# EAGLE board main (EAGLE 9.6.2)
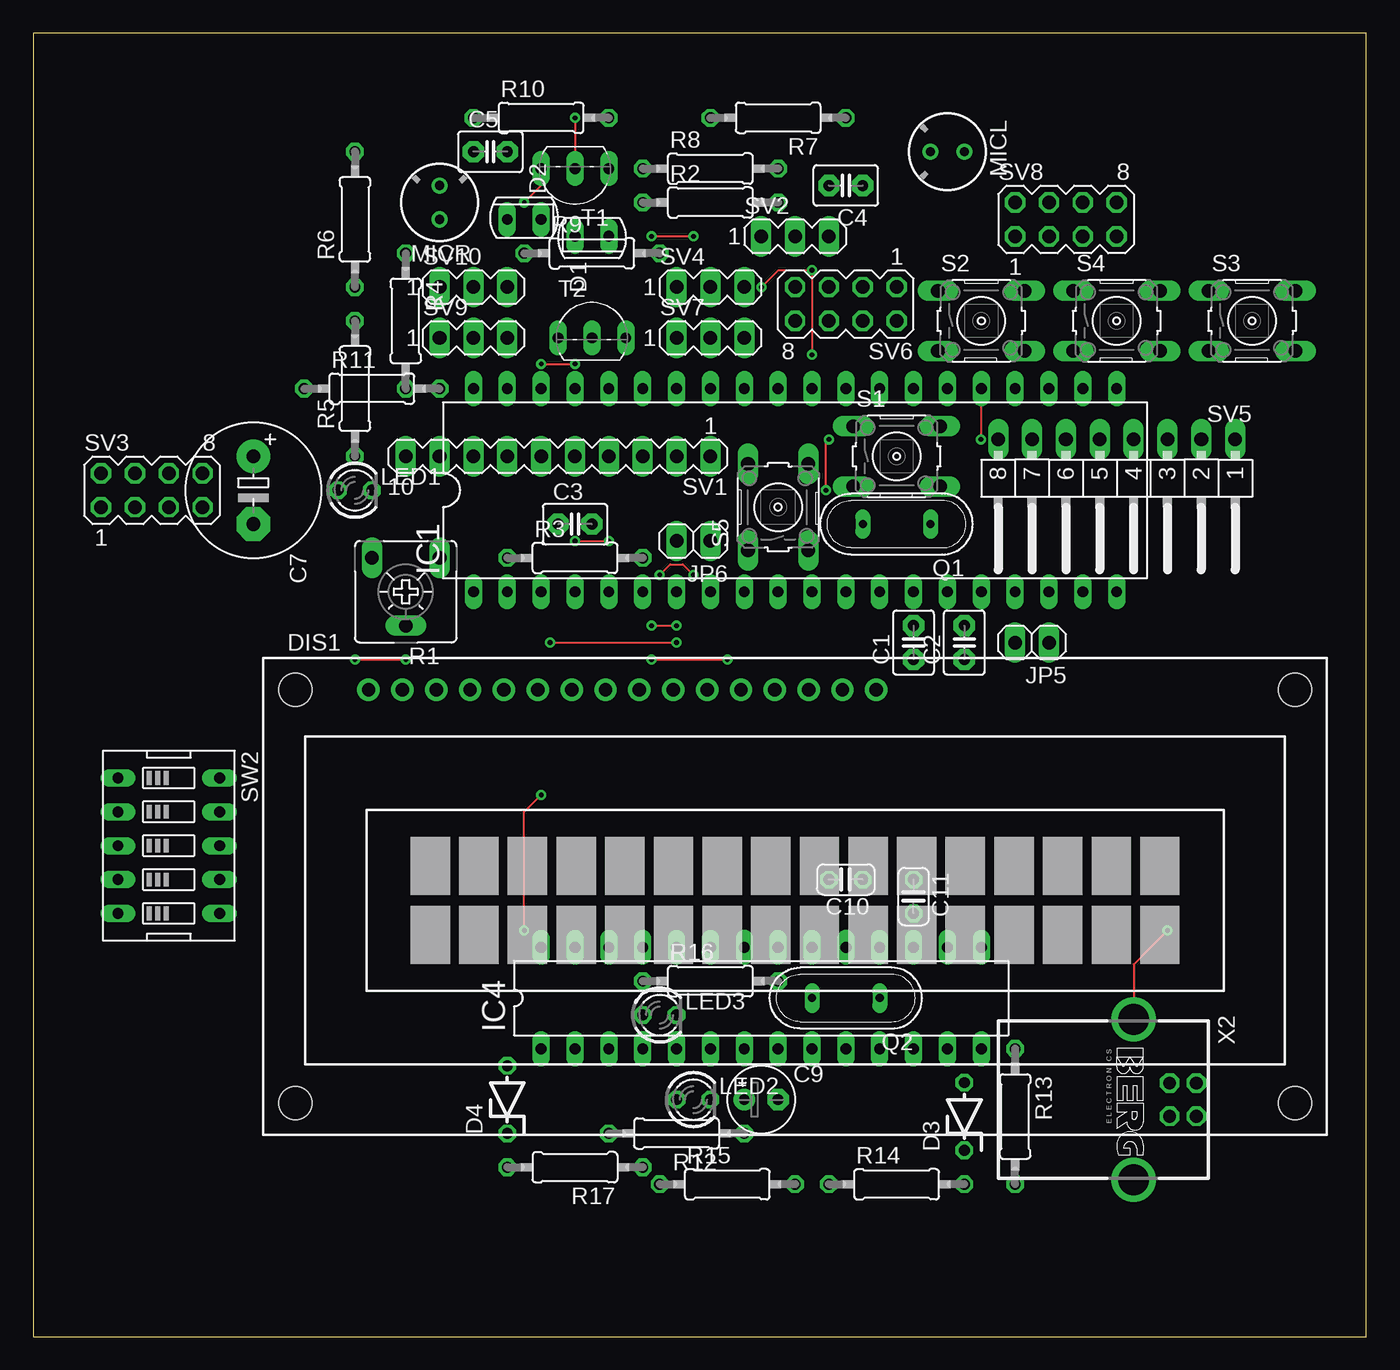
[diagram p0: board, top side]
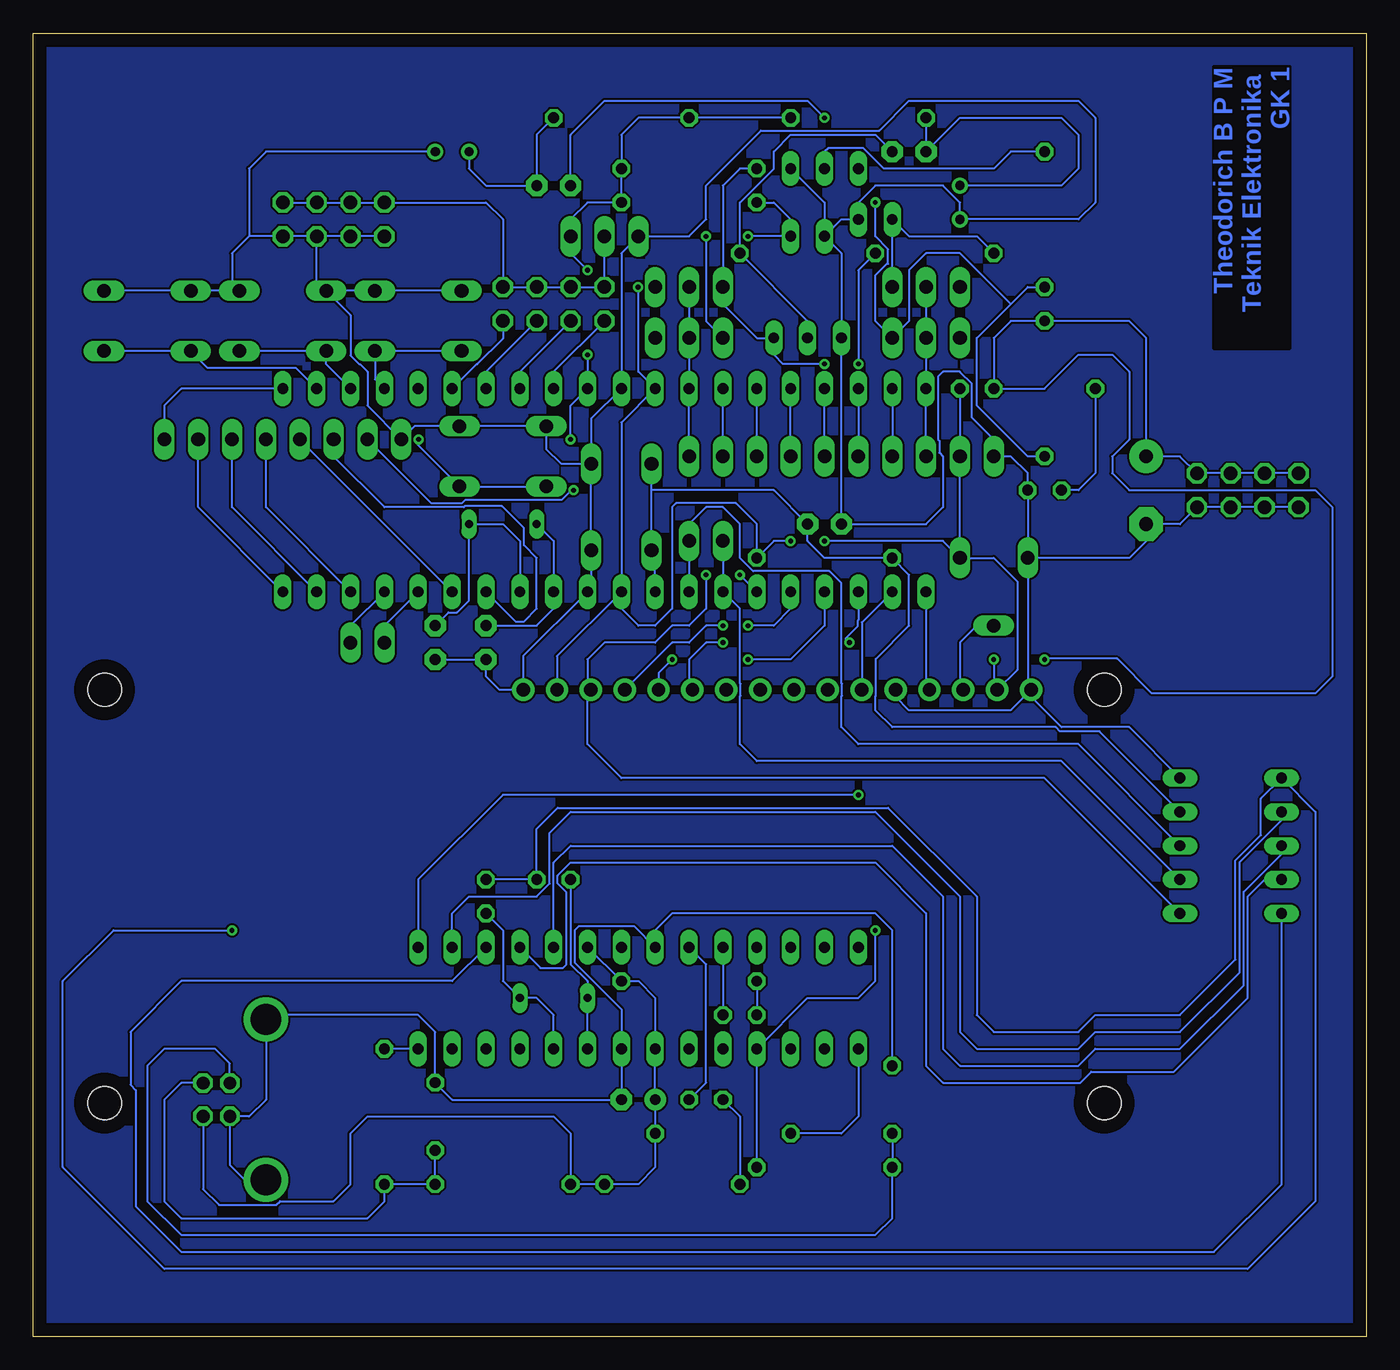
[diagram p1: board, bottom side, seen from below]

Size 100 x 97.78 mm. Coordinates in mm from the lower left corner, seen from the top.
Outline: 0,0 100,0 100,97.78 0,97.78 0,0
Copper layers (1*16): Top 0.035mm / dielectric 1.5mm / Bottom 0.035mm
Design rules "default": minimum track width 6mil, minimum drill 0.35mm, track to track 6mil, track to pad 6mil, pad to pad 6mil, via to via 6mil, smd to smd 6mil, copper to edge 40mil, drill to drill 6mil, minimum pad ring 10mil, minimum via ring 8mil, stop-mask expansion 4mil, vias tented up to drill 0mil, thermal gap 10mil

## Footprints (pad centres in the part's own frame; a part is rotated, then mirrored left to right if it is on the bottom)
C2.5-3 = drill 0.813 pad 1.6 octagon: 1 -1.27,0; 2 1.27,0
E5-10,5 = drill 1.016 pad 2.54: + -2.54,0 | drill 1.016 pad 2.54 octagon: - 2.54,0
E2,5-5 = drill 0.813 pad 1.6: + -1.27,0 | drill 0.813 pad 1.6 octagon: - 1.27,0
C025-024X044 = drill 0.813 octagon: 1 -1.27,0; 2 1.27,0
SFH225 = drill 0.813 long: A 0,1.27; K 0,-1.27
ZDIO-5 = drill 0.813 octagon: A 2.54,0; C -2.54,0
TUXGR_16X2_R2 = drill 1 pad 1.676: 1 -32,15.5; 2 -29.46,15.5; 3 -26.92,15.5; 4 -24.38,15.5; 5 -21.84,15.5; 6 -19.3,15.5; 7 -16.76,15.5; 8 -14.22,15.5; 9 -11.68,15.5; 10 -9.14,15.5; 11 -6.6,15.5; 12 -4.06,15.5; 13 -1.52,15.5; 14 1.02,15.5; 15 3.56,15.5; 16 6.1,15.5 | hole 2.5: -37.5,-15.5; 37.5,-15.5; -37.5,15.5; 37.5,15.5
DIL40 = drill 0.813 long: 1 -24.13,-7.62; 2 -21.59,-7.62; 3 -19.05,-7.62; 4 -16.51,-7.62; 5 -13.97,-7.62; 6 -11.43,-7.62; 7 -8.89,-7.62; 8 -6.35,-7.62; 9 -3.81,-7.62; 10 -1.27,-7.62; 11 1.27,-7.62; 12 3.81,-7.62; 13 6.35,-7.62; 14 8.89,-7.62; 15 11.43,-7.62; 16 13.97,-7.62; 17 16.51,-7.62; 18 19.05,-7.62; 19 21.59,-7.62; 20 24.13,-7.62; 21 24.13,7.62; 22 21.59,7.62; 23 19.05,7.62; 24 16.51,7.62; 25 13.97,7.62; 26 11.43,7.62; 27 8.89,7.62; 28 6.35,7.62; 29 3.81,7.62; 30 1.27,7.62; 31 -1.27,7.62; 32 -3.81,7.62; 33 -6.35,7.62; 34 -8.89,7.62; 35 -11.43,7.62; 36 -13.97,7.62; 37 -16.51,7.62; 38 -19.05,7.62; 39 -21.59,7.62; 40 -24.13,7.62
DIL28-3 = drill 0.813 long: 1 -16.51,-3.81; 2 -13.97,-3.81; 3 -11.43,-3.81; 4 -8.89,-3.81; 5 -6.35,-3.81; 6 -3.81,-3.81; 7 -1.27,-3.81; 8 1.27,-3.81; 9 3.81,-3.81; 10 6.35,-3.81; 11 8.89,-3.81; 12 11.43,-3.81; 13 13.97,-3.81; 14 16.51,-3.81; 15 16.51,3.81; 16 13.97,3.81; 17 11.43,3.81; 18 8.89,3.81; 19 6.35,3.81; 20 3.81,3.81; 21 1.27,3.81; 22 -1.27,3.81; 23 -3.81,3.81; 24 -6.35,3.81; 25 -8.89,3.81; 26 -11.43,3.81; 27 -13.97,3.81; 28 -16.51,3.81
1X02 = drill 1.016 long: 1 -1.27,0; 2 1.27,0
LED3MM = drill 0.813 octagon: A -1.27,0; K 1.27,0
F6050AP = drill 0.7 pad 1.2: 1 0,1.27; 2 0,-1.27
QS = drill 0.61 long: 1 -2.54,0; 2 2.54,0
CA6V = drill 1.016 long: A -2.54,-2.54; E 2.54,-2.54; S 0,2.54
0207/10 = drill 0.813 octagon: 1 -5.08,0; 2 5.08,0
B3F-10XX = drill 1.016 long: 1 -3.251,2.261; 2 3.251,2.261; 3 -3.251,-2.261; 4 3.251,-2.261
MA10-1 = drill 1.016 long: 1 -11.43,0; 2 -8.89,0; 3 -6.35,0; 4 -3.81,0; 5 -1.27,0; 6 1.27,0; 7 3.81,0; 8 6.35,0; 9 8.89,0; 10 11.43,0
MA03-1 = drill 1.016 long: 1 -2.54,0; 2 0,0; 3 2.54,0
MA04-2 = drill 1.016 octagon: 1 -3.81,-1.27; 2 -3.81,1.27; 3 -1.27,-1.27; 4 -1.27,1.27; 5 1.27,-1.27; 6 1.27,1.27; 7 3.81,-1.27; 8 3.81,1.27
MA08-1W = drill 1.016 long: 1 -8.89,0; 2 -6.35,0; 3 -3.81,0; 4 -1.27,0; 5 1.27,0; 6 3.81,0; 7 6.35,0; 8 8.89,0
EDG-05 = drill 0.813 long: 1 -5.08,-3.81; 2 -2.54,-3.81; 3 0,-3.81; 4 2.54,-3.81; 5 5.08,-3.81; 6 5.08,3.81; 7 2.54,3.81; 8 0,3.81; 9 -2.54,3.81; 10 -5.08,3.81
TO92-EBC = drill 0.813 long: B 0,-1.27; C 2.54,-1.27; E -2.54,-1.27
PN61729-S = drill 0.95 octagon: 1 1.25,4.71; 2 -1.25,4.71; 3 -1.25,2.71; 4 1.25,2.71 | drill 2.3 pad 2.9: S1 -6.02,0; S2 6.02,0

## Placement (x,y rotation side)
C1  22p  [C2.5-3]  66.04,52.07 90 top
C2  22p  [C2.5-3]  69.85,52.07 90 top
C3  10nF  [C2.5-3]  40.64,60.96 0 top
C4  100nF  [C2.5-3]  60.96,86.36 180 top
C5  100nF  [C2.5-3]  34.29,88.9 0 top
C7  1000uF/16V  [E5-10,5]  16.51,63.5 270 top
C9  10uF/16V  [E2,5-5]  54.61,17.78 0 top
C10  22pF  [C025-024X044]  60.96,34.29 180 top
C11  22pF  [C025-024X044]  66.04,33.02 270 top
D1  SFH225  [SFH225]  41.91,82.55 270 top
D2  SFH225  [SFH225]  36.83,83.82 90 top
D3  DZ3,6V  [ZDIO-5]  69.85,16.51 90 top
D4  DZ3,6V  [ZDIO-5]  35.56,17.78 90 top
DIS1  TUXGR_16X2_R2  [TUXGR_16X2_R2]  57.15,33.02 0 top
IC1  MEGA16-P  [DIL40]  57.15,63.5 0 top
IC4  MEGA8-P  [DIL28-3]  54.61,25.4 0 top
JP5  [1X02]  74.93,52.07 180 top
JP6  [1X02]  49.53,59.69 180 top
LED1  merah  [LED3MM]  24.13,63.5 0 top
LED2  Merah  [LED3MM]  49.53,17.78 0 top
LED3  hijau  [LED3MM]  46.99,24.13 0 top
MICL  MC  [F6050AP]  68.58,88.9 270 top
MICR  MC  [F6050AP]  30.48,85.09 180 top
Q1  8MHz  [QS]  64.77,60.96 180 top
Q2  12MHz  [QS]  60.96,25.4 180 top
R1  20K  [CA6V]  27.94,55.88 180 top
R2  56K  [0207/10]  50.8,85.09 0 top
R3  10K  [0207/10]  40.64,58.42 0 top
R4  56K  [0207/10]  27.94,76.2 270 top
R5  10K  [0207/10]  24.13,71.12 90 top
R6  100K  [0207/10]  24.13,83.82 90 top
R7  10K  [0207/10]  55.88,91.44 180 top
R8  10K  [0207/10]  50.8,87.63 0 top
R9  100K  [0207/10]  41.91,81.28 0 top
R10  10K  [0207/10]  38.1,91.44 0 top
R11  330  [0207/10]  25.4,71.12 0 top
R12  10K  [0207/10]  48.26,15.24 180 top
R13  68  [0207/10]  73.66,16.51 270 top
R14  2K2  [0207/10]  64.77,11.43 0 top
R15  330  [0207/10]  52.07,11.43 0 top
R16  330  [0207/10]  50.8,26.67 0 top
R17  68  [0207/10]  40.64,12.7 180 top
S1  [B3F-10XX]  64.77,66.04 0 top
S2  [B3F-10XX]  71.12,76.2 0 top
S3  [B3F-10XX]  91.44,76.2 0 top
S4  [B3F-10XX]  81.28,76.2 0 top
S5  [B3F-10XX]  55.88,62.23 90 top
SV1  [MA10-1]  39.37,66.04 180 top
SV2  [MA03-1]  57.15,82.55 0 top
SV3  [MA04-2]  8.89,63.5 0 top
SV4  [MA03-1]  50.8,78.74 0 top
SV5  [MA08-1W]  81.28,67.31 180 top
SV6  [MA04-2]  60.96,77.47 180 top
SV7  [MA03-1]  50.8,74.93 0 top
SV8  [MA04-2]  77.47,83.82 0 top
SV9  [MA03-1]  33.02,74.93 0 top
SV10  [MA03-1]  33.02,78.74 0 top
SW2  [EDG-05]  10.16,36.83 270 top
T1  [TO92-EBC]  40.64,86.36 180 top
T2  [TO92-EBC]  41.91,76.2 0 top
X2  PN61729-S  [PN61729-S]  82.55,17.78 270 top

## Library data of the parts
C1-C5 = capacitor-wima
C7 C9-C11 R2-R11 = rcl
D1 D2 = opto-trans-siemens; OC_FARNELL: unknown; OC_NEWARK: unknown
D3 D4 = diode
DIS1 = display-lcd; OC_FARNELL: unknown; OC_NEWARK: unknown
IC1 = atmel; MPN: ATMEGA16-16PU; OC_FARNELL: 9171142; OC_NEWARK: 01M6885
IC4 = atmel
JP5 JP6 = pinhead
LED1-LED3 = led
MICL MICR = microphon
Q1 Q2 SW2 = special
R1 = pot
R12-R17 = resistor
S1-S5 = switch-omron; MPN: B3F-1000; OC_FARNELL: 176432; OC_NEWARK: 36M3542
SV1-SV10 = con-lstb; OC_FARNELL: unknown; OC_NEWARK: unknown
T1 T2 = transistor
X2 = con-berg

## Nets
DGND: C9.- C10.1 C11.1 D3.A D4.A IC4.8 IC4.22 SW2.1 X2.4 X2.S1 X2.S2
GND: C1.1 C2.1 C3.1 C7.- D1.K D2.K DIS1.1 DIS1.5 DIS1.16 IC1.11 IC1.31 LED1.K MICL.1 MICR.1 R1.E S1.1 S1.2 S2.1 S2.2 S3.1 S3.2 S4.1 S4.2 S5.3 S5.4 SV1.10 SV2.1 SV3.1 SV3.3 SV3.5 SV3.7 SV5.8 SV8.1 SV8.3 SV8.5 SV8.7 SW2.10 T1.E T2.E
MISO: IC1.7 JP6.2 SW2.7
MOSI: DIS1.14 IC1.6 SW2.6
N$1: IC1.33 SV1.1 SV4.2 SV7.2
N$2: IC1.34 SV1.2
N$3: IC1.35 SV1.3
N$4: IC1.36 SV1.4
N$5: IC1.37 SV1.5
N$6: IC1.38 SV1.6
N$7: IC1.39 SV1.7
N$8: D2.A R4.1 SV10.3
N$9: IC1.24 S2.3 S2.4
N$10: DIS1.13 IC1.5
N$11: DIS1.12 IC1.4
N$12: DIS1.11 IC1.3
N$13: DIS1.6 IC1.2
N$14: R5.1 R6.1 SV9.3 T1.C
N$15: DIS1.3 R1.S
N$16: C1.2 IC1.12 Q1.2
N$17: C2.2 IC1.13 Q1.1
N$18: DIS1.4 IC1.1
N$19: D1.A R2.1 SV7.1
N$20: IC1.23 S4.3 S4.4
N$21: IC1.40 SV1.8 SV9.2 SV10.2
N$22: C4.2 R6.2 T1.B
N$23: C4.1 MICL.2 R7.1
N$24: R8.1 R9.1 SV4.1 T2.C
N$25: C5.2 R9.2 T2.B
N$26: C5.1 MICR.2 R10.1
N$27: IC1.22 S3.3 S3.4
N$28: IC1.25 S1.3 S1.4
N$30: IC1.21 SV5.1
N$32: IC1.20 SV5.2
N$33: IC1.19 SV5.3
N$34: IC1.18 SV5.4
N$35: IC1.15 SV5.5
N$36: IC1.14 SV5.6
N$37: IC1.16 JP5.2
N$38: IC1.17 JP5.1
N$41: LED1.A R11.1
N$42: IC4.1 R12.2
N$44: IC1.26 SV6.2
N$45: IC1.27 SV6.4
N$46: IC1.28 SV6.6
N$47: IC1.29 SV6.8
N$51: C10.2 IC4.9 Q2.2
N$52: C11.2 IC4.10 Q2.1
N$53: IC4.14 R13.1
N$55: LED2.A R15.1
N$56: LED3.A R16.1
N$57: IC4.23 LED2.K
N$58: IC4.24 LED3.K
N$59: D4.C R17.2 X2.3
N$67: IC4.4 IC4.15 R17.1
N$69: D3.C R13.2 R14.2 X2.2
N$175: IC4.17 SW2.5
N$176: IC4.18 SW2.4
N$177: IC4.19 SW2.3
N$178: IC4.16 SW2.2
RESET: C3.2 IC1.9 R3.1 S5.1 S5.2 SW2.9
SCK: IC1.8 JP6.1 SW2.8
VCC: C7.+ DIS1.2 DIS1.15 IC1.10 IC1.30 IC1.32 R1.A R2.2 R3.2 R4.2 R5.2 R7.2 R8.2 R10.2 R11.2 SV1.9 SV2.3 SV3.2 SV3.4 SV3.6 SV3.8 SV5.7
VDD: SV2.2 SV6.1 SV6.3 SV6.5 SV6.7 SV8.2 SV8.4 SV8.6 SV8.8
VPP: C9.+ IC4.7 IC4.20 R12.1 R14.1 R15.2 R16.2 X2.1

## Tracks (layer width: path | path; a pad name or v marks a point on that pad's centre or on a via)
DGND  (via drill 0.35)
  Top 0.152: v85.09,30.48 82.55,27.94 X2.S1
  Bottom 0.152: X2.S2 84.15,11.76 85.26,12.87 X2.4 85.24,16.51 83.82,16.51 82.55,17.78 X2.S1 82.55,24.13 71.12,24.13 69.85,22.86 D3.A 68.58,17.78 C9.- IC4.8 55.88,24.56 59.38,28.07 59.38,30.48 59.11,30.76 54.89,30.76 IC4.22 53.34,30.48 52.07,31.75 36.83,31.75 35.56,30.48 D4.A | C11.1 C10.1 62.23,38.1 60.66,39.67 35.87,39.67 29.21,33.02 29.21,24.13 27.94,22.86 21.59,22.86 20.32,24.13 13.97,24.13 9.8,28.3 9.8,35.72 7.9,37.63 7.9,40.36 SW2.1 | SW2.1 5.08,41.91 | SW2.1 3.81,39.37 3.81,10.16 8.89,5.08 90.17,5.08 97.79,12.7 97.79,26.67 93.98,30.48 v85.09,30.48
GND
  Bottom 0.152: C2.1 C1.1 66.04,49.53 65.03,48.52 DIS1.16 63.25,51.05 IC1.11 58.14,56.16 S5.3 S5.4 | S5.4 58.14,68.86 IC1.31 55.88,81.28 SV2.1 50.8,82.55 49.53,83.82 49.53,86.36 45.41,90.47 36.52,90.47 34.29,92.71 21.59,92.71 20.32,91.44 20.32,85.09 21.59,83.82 MICR.1 30.48,85.09 31.75,86.36 36.83,86.36 38.1,85.09 D2.K 39.37,83.82 D1.K | S5.4 60.4,65.48 61.52,66.6 S1.1 S1.2 71.4,68.3 SV5.8 74.93,69.85 74.93,72.39 75.49,72.95 75.54,72.95 76.2,73.61 76.2,76.63 S4.1 | SW2.10 17.78,45.72 22.86,45.72 25.15,48.01 DIS1.1 | R1.E 25.4,48.77 DIS1.1 | DIS1.1 26.67,47 26.67,46.99 34.29,46.99 35.31,48.01 DIS1.5 | SV3.1 SV3.3 SV3.5 SV3.7 13.97,60.96 C7.- 16.51,59.69 17.78,58.42 R1.E | R1.E LED1.K 25.4,64.77 26.67,66.04 SV1.10 27.94,67.31 29.59,68.96 29.59,71.49 30.48,72.38 30.48,72.39 31.75,72.39 32.13,72.01 32.13,67.31 32.03,67.21 32.03,66.32 31.75,66.04 31.75,62.23 33.02,60.96 C3.1 T2.E 39.37,81.28 D1.K | S2.1 S2.2 S4.1 | S4.1 78.74,79.17 SV8.5 | 83.82,82.55 SV8.7 SV8.5 | 83.82,82.55 85.09,81.28 85.09,79.02 S4.2 S3.1 S3.2 | SV8.5 SV8.3 SV8.1 | MICL.1 82.55,88.9 83.82,87.63 83.82,82.55 | T1.E 40.64,85.09 D1.K
MISO
  Bottom 0.152: JP6.2 IC1.7 46.99,54.61 46.99,49.01 46.94,48.96 46.94,48.08 46.99,48.03 46.99,44.45 45.72,43.18 22.86,43.18 SW2.7
MOSI  (via drill 0.35)
  Top 0.152: v46.99,57.15 47.78,57.94 48.74,57.94 v49.53,57.15
  Bottom 0.152: SW2.6 24.13,41.91 55.88,41.91 58.42,44.45 58.42,48.27 | 58.42,48.27 DIS1.14 | IC1.6 v46.99,57.15 | v49.53,57.15 49.53,54.61 50.8,53.34 52.07,53.34 53.34,52.07 57.15,52.07 58.42,50.8 58.42,48.27
N$1
  Bottom 0.152: SV1.1 IC1.33 SV7.2 SV4.2
N$2
  Bottom 0.152: SV1.2 IC1.34
N$3
  Bottom 0.152: SV1.3 IC1.35
N$4
  Bottom 0.152: SV1.4 IC1.36
N$5
  Bottom 0.152: SV1.5 IC1.37
N$6
  Bottom 0.152: IC1.38 SV1.6
N$7
  Bottom 0.152: IC1.39 SV1.7
N$8
  Bottom 0.152: SV10.3 D2.A 34.29,82.55 29.21,82.55 R4.1
N$9
  Bottom 0.152: S2.4 74.37,73.66 | 74.37,73.66 74.37,71.83 IC1.24 | S2.3 73.38,73.94 73.66,73.66 74.37,73.66
N$10  (via drill 0.35)
  Top 0.152: v46.38,53.34 v48.26,53.34
  Bottom 0.152: IC1.5 43.18,54.61 44.45,53.34 v46.38,53.34 46.69,53.34 | v48.26,53.34 49.53,53.34 50.8,52.07 52.08,52.07 DIS1.13
N$11  (via drill 0.35)
  Top 0.152: v46.38,50.8 v52.07,50.8
  Bottom 0.152: IC1.4 40.64,53.34 43.18,50.8 v46.38,50.8 46.69,50.8 | v52.07,50.8 53.09,49.78 DIS1.12
N$12  (via drill 0.35)
  Top 0.152: v38.76,52.07 v48.26,52.07
  Bottom 0.152: IC1.3 38.1,53.77 38.16,53.72 38.16,53.28 39.06,52.38 39.06,52.07 v38.76,52.07 | v48.26,52.07 49.53,52.07 50.8,50.8 50.8,48.77 DIS1.11
N$13
  Bottom 0.152: IC1.2 37.85,53.59 DIS1.6
N$14  (via drill 0.35)
  Top 0.152: v36.83,85.09 38.1,86.36 T1.C
  Bottom 0.152: R5.1 25.4,66.04 29.21,69.85 29.21,74.93 26.67,77.47 | R6.1 25.4,78.74 26.67,77.47 | 26.67,77.47 30.48,81.28 33.02,81.28 34.29,80.01 34.29,76.2 SV9.3 36.83,76.2 36.83,79.63 35.97,80.49 35.87,80.49 35.87,81.58 36.83,82.55 v36.83,85.09
N$15
  Bottom 0.152: R1.S 29.21,53.34 30.48,52.07 30.48,48.77 DIS1.3
N$16
  Bottom 0.152: C1.2 62.23,53.34 60.96,54.61 IC1.12 60.96,59.69 Q1.2
N$17
  Bottom 0.152: C2.2 68.86,54.33 68.21,54.33 67.31,55.23 Q1.1 64.77,60.96 63.5,59.69 IC1.13
N$18
  Bottom 0.152: IC1.1 33.02,48.77 DIS1.4
N$19  (via drill 0.35)
  Top 0.152: v46.38,82.55 v49.53,82.55
  Bottom 0.152: R2.1 44.45,85.09 43.18,83.82 D1.A v46.38,82.55 46.69,82.55 | v49.53,82.55 49.53,76.2 SV7.1
N$20
  Bottom 0.152: IC1.23 78.03,72.95 S4.3 83.54,73.94 83.82,73.66 84.25,73.66 S4.4
N$21
  Bottom 0.152: SV1.8 IC1.40 SV9.2 SV10.2
N$22  (via drill 0.35)
  Top 0.152: v40.64,91.44 T1.B
  Bottom 0.152: R6.2 26.67,88.9 27.94,87.63 36.18,87.63 37.73,89.18 40.36,89.18 40.64,88.9 T1.B | C4.2 59.69,90.17 57.15,92.71 41.91,92.71 v40.64,91.44
N$23
  Bottom 0.152: R7.1 62.23,90.17 C4.1 66.04,86.36 67.31,87.63 MICL.2
N$24  (via drill 0.35)
  Top 0.152: v38.1,72.97 v40.64,72.97 40.64,72.87
  Bottom 0.152: R8.1 46.99,87.63 48.26,86.36 SV4.1 48.26,77.47 45.72,74.93 T2.C 44.45,73.66 43.76,72.97 v40.64,72.97 | R9.1 38.1,80.01 v38.1,72.97 38.1,72.67
N$25
  Bottom 0.152: C5.2 36.83,90.17 43.18,90.17 44.45,88.9 44.45,87.63 46.99,85.09 R9.2 41.91,76.2 T2.B
N$26
  Bottom 0.152: R10.1 C5.1 30.48,91.44 22.86,91.44 21.59,90.17 21.59,87.63 22.86,86.36 MICR.2
N$27
  Bottom 0.152: IC1.22 80.29,72.67 86.92,72.67 S3.3 S3.4
N$28  (via drill 0.35)
  Top 0.152: v71.1,67.31 71.12,67.33 IC1.25
  Bottom 0.152: S1.3 S1.4 71.12,66.88 71.12,67.31 v71.1,67.31
N$29
  pour Bottom: 0,97.79 100.33,97.79 100.33,0 0,0
N$30
  Bottom 0.152: IC1.21 88.9,71.12 90.17,69.85 SV5.1
N$32
  Bottom 0.152: IC1.20 87.63,62.23 SV5.2
N$33
  Bottom 0.152: IC1.19 85.09,62.23 SV5.3
N$34
  Bottom 0.152: IC1.18 82.55,62.23 SV5.4
N$35
  Bottom 0.152: IC1.15 SV5.5
N$36
  Bottom 0.152: SV5.6 77.47,66.04 73.66,62.23 67.71,62.23 67.64,62.31 64.85,62.31 63.2,60.66 63.2,59.38 62.23,58.42 62.23,54.61 63.2,53.64 63.8,53.64 IC1.14
N$37
  Bottom 0.152: IC1.16 73.66,53.34 JP5.2
N$38
  Bottom 0.152: IC1.17 76.2,53.34 JP5.1
N$41
  Bottom 0.152: R11.1 20.32,64.77 21.59,63.5 LED1.A
N$42
  Bottom 0.152: IC4.1 38.1,16.51 39.37,15.24 R12.2
N$44
  Bottom 0.152: IC1.26 66.75,72.95 66.7,72.95 64.77,74.88 SV6.2
N$45
  Bottom 0.152: SV6.4 66.04,72.39 IC1.27
N$46
  Bottom 0.152: SV6.6 63.5,72.39 IC1.28
N$47
  Bottom 0.152: SV6.8 60.96,72.39 IC1.29
N$51
  Bottom 0.152: IC4.9 Q2.2 58.42,26.67 59.69,27.94 C10.2
N$52
  Bottom 0.152: C11.2 64.77,30.48 64.77,26.67 Q2.1 62.23,25.4 60.96,24.13 IC4.10
N$53
  Bottom 0.152: IC4.14 R13.1
N$55
  Bottom 0.152: LED2.A 46.99,16.51 R15.1
N$56
  Bottom 0.152: R16.1 LED3.A
N$57
  Bottom 0.152: LED2.K 49.53,19.05 49.53,27.94 IC4.23
N$58
  Bottom 0.152: IC4.24 LED3.K
N$59
  Bottom 0.152: D4.C R17.2 35.56,8.89 36.83,7.62 88.9,7.62 91.44,10.16 91.44,20.32 90.17,21.59 86.36,21.59 85.26,20.49 X2.3
N$67  (via drill 0.35)
  Top 0.152: v36.83,30.48 36.83,39.37 v38.1,40.64
  Bottom 0.152: R17.1 IC4.4 41.91,25.4 38.1,25.4 36.83,26.67 v36.83,30.48 | v38.1,40.64 64.77,40.64 71.12,34.29 IC4.15
N$69
  Bottom 0.152: X2.2 88.88,19.03 88.9,19.05 90.17,17.78 90.17,10.16 88.9,8.89 74.93,8.89 73.66,10.16 R13.2 R14.2 D3.C
N$175
  Bottom 0.152: IC4.17 68.58,26.67 88.9,26.67 92.71,22.86 92.71,18.89 92.31,18.49 92.31,9.76 88.9,6.35 11.43,6.35 6.35,11.43 SW2.5
N$176
  Bottom 0.152: IC4.18 61.95,27.66 60.27,27.66 59.99,27.94 59.99,33.32 60.66,33.98 60.66,34.59 59.69,35.56 36.83,35.56 33.02,31.75 33.02,20.32 31.75,19.05 21.43,19.05 20.62,19.86 14.43,19.86 8.89,25.4 8.89,33.02 7.62,34.29 SW2.4
N$177
  Bottom 0.152: IC4.19 60.96,35.56 59.69,36.83 35.56,36.83 31.75,33.02 31.75,21.59 30.48,20.32 21.59,20.32 20.32,21.59 13.97,21.59 9.2,26.37 9.2,33.36 6.35,36.21 SW2.3
N$178
  Bottom 0.152: IC4.16 68.58,31.75 67.31,33.02 62.23,33.02 61.27,33.98 61.27,37.79 59.69,39.37 36.83,39.37 30.48,33.02 30.48,22.86 29.21,21.59 21.59,21.59 20.32,22.86 13.97,22.86 9.5,27.33 9.5,35.6 6.35,38.75 SW2.2
RESET
  Bottom 0.152: 53.62,63.5 S5.1 53.34,58.7 IC1.9 | 53.62,63.5 S5.2 | SW2.9 20.02,45.41 22.99,45.41 23.29,45.72 35.56,45.72 36.83,46.99 36.83,48.03 36.78,48.08 36.78,50.85 34.29,53.34 34.29,57.15 R3.1 40.64,58.42 41.91,59.69 C3.2 44.45,63.5 53.62,63.5
SCK
  Bottom 0.152: IC1.8 JP6.1 50.8,60.96 49.53,62.23 48.26,62.23 46.99,60.96 46.99,58.42 46,57.43 40.27,57.43 39.37,56.53 39.37,49.01 39.32,48.96 39.32,48.08 39.37,48.03 39.37,45.72 38.1,44.45 21.59,44.45 SW2.8
VCC  (via drill 0.35)
  Top 0.152: v59.46,63.5 59.46,67.08 v59.69,67.31 | v58.42,73.66 v58.42,80.01 55.9,80.01 v54.63,78.74 | v40.64,59.69 v43.18,59.69 | v24.13,50.8 v27.94,50.8
  Bottom 0.152: IC1.10 60.71,51.05 DIS1.15 | R1.A SV1.9 R11.2 | IC1.10 55.88,54.61 54.61,53.34 53.34,53.34 52.07,54.61 52.07,62.23 51.77,62.53 47.3,62.53 45.72,60.96 R3.2 44.45,59.69 v43.18,59.69 | R1.A 27.94,58.42 26.19,56.67 26.19,50.02 DIS1.2 27.94,48.77 v27.94,50.8 | SV3.2 SV3.4 SV3.6 SV3.8 13.97,66.04 C7.+ 16.51,74.93 17.78,76.2 R5.2 26.67,76.2 27.94,74.93 R4.2 24.13,71.12 21.59,73.66 19.05,73.66 17.78,72.39 17.78,67.31 19.05,66.04 19.05,64.77 17.78,63.5 3.81,63.5 2.54,62.23 2.54,49.53 3.81,48.26 16.08,48.26 18.68,50.86 24.07,50.86 v24.13,50.8 | R10.2 R7.2 54.61,91.44 55.88,90.17 R8.2 R2.2 58.42,85.09 59.69,83.82 SV2.3 59.69,81.28 v58.42,80.01 | SV5.7 70.15,62.53 67.84,62.53 67.58,62.79 60.35,62.79 59.77,63.37 59.77,63.42 59.69,63.5 v59.46,63.5 | v59.69,67.31 59.69,69.85 IC1.30 v58.42,73.66 | IC1.10 55.88,68.58 IC1.32 54.61,72.39 54.61,78.74 v54.63,78.74 | R1.A 31.75,59.69 v40.64,59.69
VDD
  Bottom 0.152: SV8.8 SV8.6 SV8.4 SV8.2 66.04,85.09 64.77,83.82 SV6.1 SV6.3 SV6.5 SV6.7 SV2.2
VPP
  Bottom 0.152: X2.1 87.26,11.06 86.07,9.87 81.77,9.87 81.48,10.16 77.47,10.16 76.2,11.43 76.2,15.24 74.93,16.51 60.96,16.51 59.69,15.24 R14.1 R15.2 54.61,11.43 53.34,12.7 R12.1 C9.+ IC4.7 53.34,25.4 54.61,26.67 R16.2 IC4.20

## Text on the board
Bottom: Theodorich B P M / Teknik Elektronika / GK 1